# Altium PCB pcb_take1.PcbDoc (part 3 of 3)
Units mm, origin at the board's own origin, x right, y up, seen from the top; angles counter-clockwise.
Board outline 120 x 150 mm, 10 copper layers (Top Layer, Mid-Layer 1, Internal Plane 1, Internal Plane 2, Mid-Layer 2, MidLayer3, Mid-Layer 4, Mid-Layer 5, Mid-Layer 6, Bottom Layer); 173 components, 196 nets, 996 pads, 586 vias.
Unrouted connection lines stored in the file: 1.
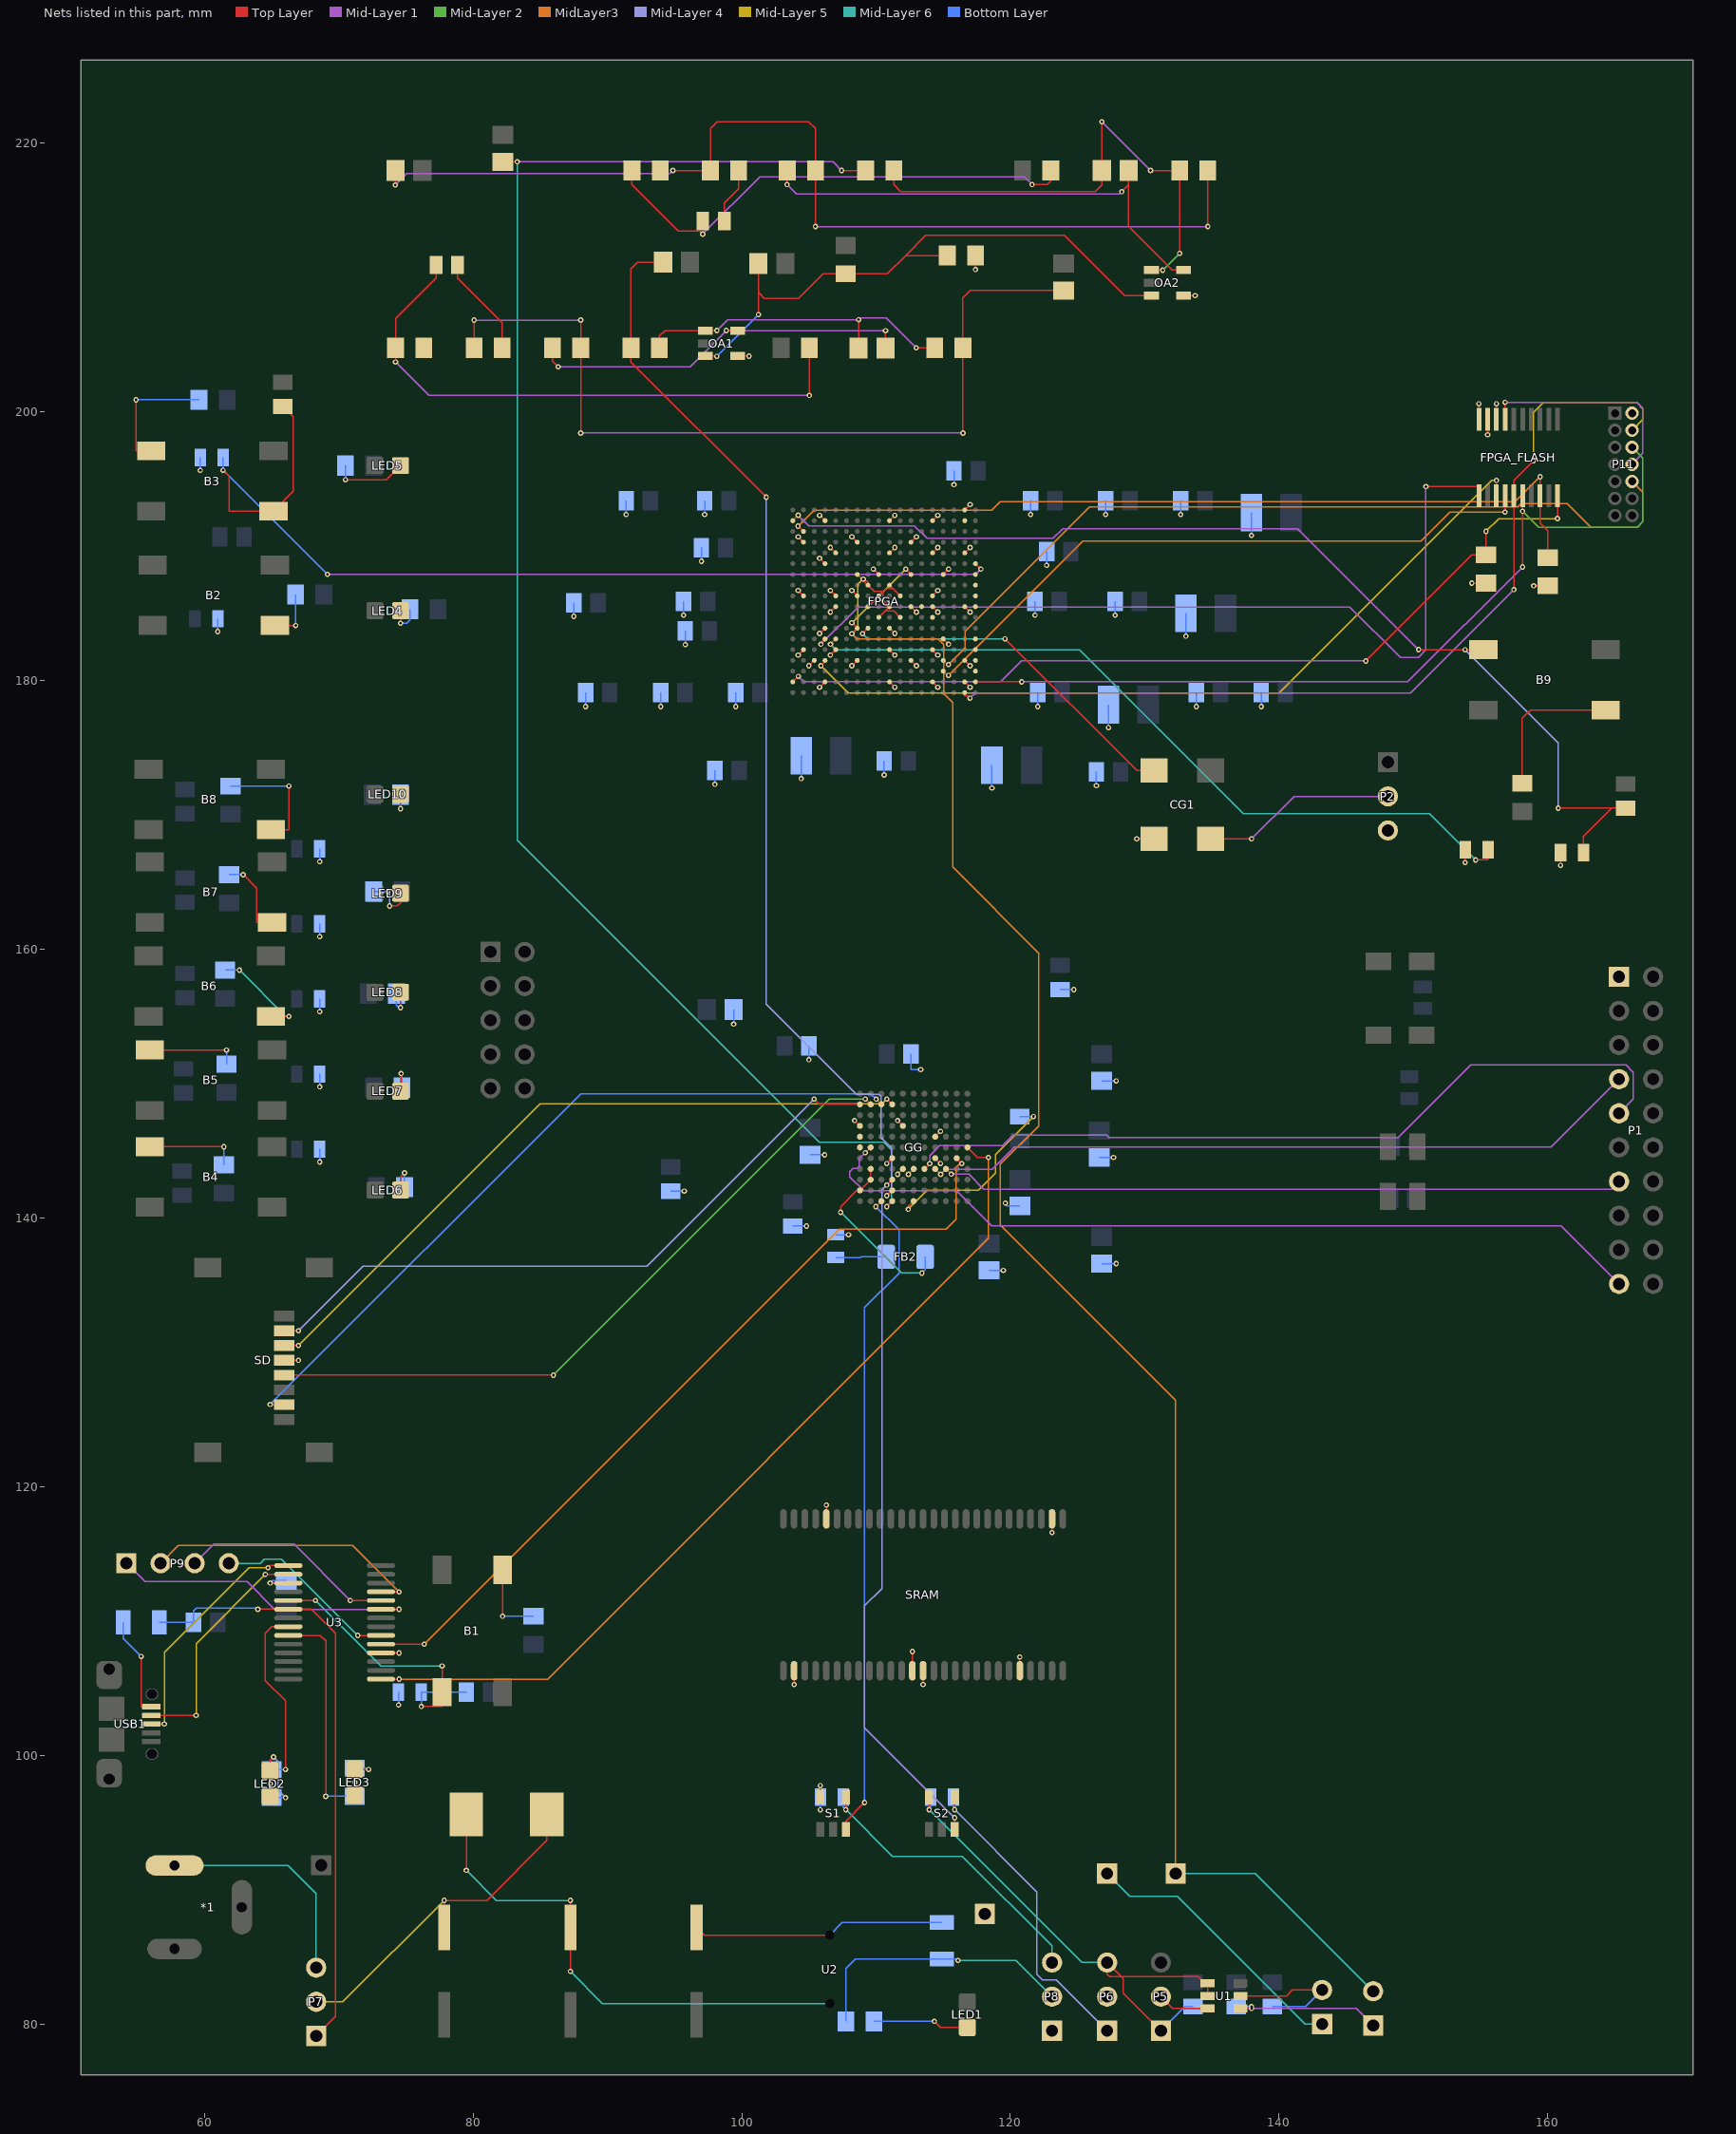
[diagram p11: the nets of this part, all layers, seen from the top]

## Via types
v1: diameter 0.4, hole 0.2, Top Layer to Bottom Layer, 586 vias

## Nets (pads, with @x,y where several pads share a name; then routed paths per layer and width w, separated by ;. In a path a pad name is that pad's centre, name@x,y a point inside that pad or via, vN(x,y) a via of type N, cw(c..) or ccw(c..) an arc to the next point about the centre after c; other vN are vias at no path point) (continued)
GPIO_FPGA3: B3.1 C55.2 FPGA.A6 R10.1 | length 76.6
  Top Layer w0.1: v1(61.392,195.656) 61.832,195.216 61.832,192.6 B3.1@65.15,192.6 66.624,194.074 66.624,199.626 C55.2@65.85,200.4 ; FPGA.A6@117.4,188.7 v1(117.805,188.295)
  Mid-Layer 1 w0.1: v1(69.155,187.909) 117.42,187.909 v1(117.805,188.295)
  Bottom Layer w0.1: v1(61.392,195.656) v1@61.4,195.664 ; R10.1@61.4,196.6 v1@61.4,195.664 ; v1(69.155,187.909) v1@61.4,195.664
GPIO_FPGA4: FPGA.A7
GPIO_FPGA5: FPGA.A8
GPIO_FPGA6: FPGA.A9
GPIO_FPGA7: FPGA.A10
GPIO_FPGA8: FPGA.F10
GPIO_FPGA9: FPGA.E11
GPIO_FPGA10: FPGA.A13
GPIO_FPGA11: FPGA.A14
GPIO_FPGA12: FPGA.A15
GPIO_FPGA13: FPGA.A16
GPIO_FPGA14: FPGA.B2
Net1_1: 1.1 GG.H10 R35.1 | length 81.3
  Top Layer w0.1: 1.1@94.147,211.135 92.253,211.135 91.762,210.644 R35.1@91.762,204.762 91.762,203.716 v1(101.829,193.65) ; v1(110.795,141.656) 110.806,141.656 GG.H10@111.2,142.05
  Mid-Layer 4 w0.1: v1(101.829,193.65) 101.829,155.905 108.534,149.2 110.236,149.2 110.363,149.073 110.363,145.999 111.15,145.212 111.15,142.011 v1(110.795,141.656)
Net2_1: 2.1 OA1.3 OA2.3 R36.1 R37.1 | length 45.4
  Top Layer w0.1: OA1.3@97.3,204.15 98.135,204.15 v1(98.146,204.14) ; v1(101.247,207.241) 101.247,208.89 ; 2.1@101.247,211.035 101.247,208.89 ; R36.1@115.297,211.635 112.196,211.635 ; OA2.3@130.5,208.65 128.499,208.65 124.017,213.131 113.692,213.131 112.196,211.635 ; 101.247,208.89 101.679,208.458 104.216,208.458 106.043,210.285 R37.1@107.747,210.285 110.846,210.285 112.196,211.635
  Bottom Layer w0.1: v1(98.146,204.14) v1(101.247,207.241)
Net3_1: 3.1 GG.H11 R43.1 | length 120.1
  Top Layer w0.1: 3.1@82.211,218.613 v1(83.287,218.613) ; v1(107.437,217.962) R43.1@109.228,217.962 ; v1(110.795,140.843) 110.795,140.845 GG.H11@111.2,141.25
  Mid-Layer 1 w0.1: v1(83.287,218.613) 106.786,218.613 v1(107.437,217.962)
  Mid-Layer 6 w0.1: v1(83.287,218.613) 83.287,168.123 105.766,145.644 110.592,145.644 111.15,145.085 111.15,141.199 v1(110.795,140.843)
NetB1_1: B1.1 C53.2 R7.1 U3.19 | length 22.5
  Top Layer w0.1: U3.19@66.25,111.525 v1(68.282,111.525) ; v1(76.15,103.632) 77.7,103.632 B1.1@77.7,104.7 v1(77.7,106.655)
  Mid-Layer 6 w0.1: v1(68.282,111.525) 73.152,106.655 v1(77.7,106.655)
  Bottom Layer w0.1: v1(76.15,103.632) R7.1@76.15,104.7 C53.2@79.5,104.7
NetB1_3: B1.3 R8.1 | length 5.8
  Top Layer w0.1: v1(82.2,110.35) B1.3@82.2,113.8
  Bottom Layer w0.1: v1(82.2,110.35) R8.1@84.5,110.35
NetB2_3: B2.3 R11.1 | length 3.9
  Top Layer w0.1: B2.3@65.25,184.1 v1(66.8,184.1)
  Bottom Layer w0.1: v1(66.8,184.1) R11.1@66.8,186.4
NetB3_3: B3.3 R14.1 | length 9.6
  Top Layer w0.1: v1(54.919,200.9) 54.919,197.1 B3.3@56.05,197.1
  Bottom Layer w0.1: v1(54.919,200.9) R14.1@59.6,200.9
NetB4_3: B4.3 R20.1 | length 6.8
  Top Layer w0.1: B4.3@55.95,145.3 v1(61.45,145.3)
  Bottom Layer w0.1: R20.1@61.45,143.95 v1(61.45,145.3)
NetB5_3: B5.3 R21.1 | length 6.7
  Top Layer w0.1: B5.3@55.95,152.5 v1(61.65,152.5)
  Bottom Layer w0.1: R21.1@61.65,151.45 v1(61.65,152.5)
NetB6_3: B6.3 R22.1 | length 7.5
  Top Layer w0.1: B6.3@64.95,155 v1(66.294,155)
  Mid-Layer 6 w0.1: v1(62.611,158.45) 66.061,155 v1(66.294,155)
  Bottom Layer w0.1: R22.1@61.55,158.45 v1(62.611,158.45)
NetB7_3: B7.3 R23.1 | length 6.2
  Top Layer w0.1: v1(62.89,165.55) 63.906,164.534 63.906,162 B7.3@65.05,162
  Bottom Layer w0.1: R23.1@61.85,165.55 v1(62.89,165.55)
NetB8_3: B8.3 R24.1 | length 8.9
  Top Layer w0.1: B8.3@64.95,168.9 66.284,168.9 66.294,168.91 v1(66.294,172.15)
  Bottom Layer w0.1: R24.1@61.95,172.15 v1(66.294,172.15)
NetB9_1: B9.1 C67.2 FPGA.V2 R47.1 | length 80.2
  Top Layer w0.1: FPGA.V2@103.8,191.9 v1(104.203,192.303) ; v1(150.393,182.3) v1@153.848,182.3 ; v1(153.848,182.296) v1@153.848,182.3 ; B9.1@155.2,182.3 v1@153.848,182.3 ; v1(160.782,170.5) 164.77,170.5 ; R47.1@162.65,167.2 162.65,168.38 164.77,170.5 ; C67.2@165.8,170.5 164.77,170.5
  Mid-Layer 1 w0.1: v1(104.203,192.303) 104.991,191.516 112.852,191.516 113.792,190.576 123.165,190.576 123.901,191.313 141.381,191.313 v1(150.393,182.3)
  Mid-Layer 4 w0.1: v1(153.848,182.296) 160.782,175.362 v1(160.782,170.5)
NetB9_3: B9.3 R48.1 | length 11.3
  Top Layer w0.1: R48.1@158.1,172.35 158.1,177.19 158.71,177.8 B9.3@164.3,177.8
NetC1_1: C1.1 GG.F11 | length 14.8
  Top Layer w0.1: v1(112.395,140.64) 112.395,140.845 GG.F11@112.8,141.25
  Mid-Layer 5 w0.1: v1(112.395,140.64) 113.817,142.062 117.604,142.062 118.889,143.347 118.889,144.721 v1(121.717,147.549)
  Bottom Layer w0.1: C1.1@120.7,147.55 121.715,147.55 v1(121.717,147.549)
NetC45_1: C45.1 P4.1 U1.4 | length 11.8
  Top Layer w0.1: U1.4@137.125,81.15 v1@137.797,81.15 ; v1(137.947,81.3) v1@137.797,81.15 ; v1(137.95,81.153) 137.947,81.15 v1@137.797,81.15
  Mid-Layer 1 w0.1: v1(137.95,81.153) 145.747,81.153 P4.1@147,79.9
  Bottom Layer w0.1: C45.1@136.8,81.3 v1(137.947,81.3)
NetC46_2: C46.2 P3.2 U1.5 | length 10.5
  Top Layer w0.1: U1.5@137.125,82.1 140.556,82.1 140.996,82.54 P3.2@143.2,82.54
  Bottom Layer w0.1: C46.2@139.5,81.3 141.96,81.3 P3.2@143.2,82.54
NetC47_1: C47.1 P5.1 P6.3 R2.1 S2.5 U1.1 U1.2 | length 39.3
  Top Layer w0.1: v1(113.95,95.961) S2.5@113.95,96.9 ; P5.1@131.2,79.5 128.397,82.303 128.397,83.383 128.265,83.515 ; U1.2@134.675,82.1 U1.1@134.675,83.05 134.442,83.05 133.977,83.515 128.265,83.515 ; 128.265,83.515 127.403,83.515 127.2,83.718 P6.3@127.2,84.58 128.265,83.515
  Mid-Layer 6 w0.1: v1(113.95,95.961) 125.331,84.58 P6.3@127.2,84.58
  Bottom Layer w0.1: v1(113.95,95.961) 114.05,96.061 R2.1@114.05,96.9 ; P5.1@131.2,79.5 133,81.3 C47.1@133.6,81.3
NetC48_2: C48.2 L1.1 P7.2 | length 26.1
  Top Layer w0.1: C48.2@77.851,87.197 v1(77.851,89.205) 81.026,89.205 85.5,93.679 L1.1@85.5,95.6
  Mid-Layer 5 w0.1: P7.2@68.326,81.661 70.307,81.661 v1(77.851,89.205)
NetC49_2: C49.2 L1.2 U2.1 | length 38.4
  Top Layer w0.1: v1(79.5,91.44) L1.2@79.5,95.6 ; v1(87.249,83.922) C49.2@87.249,87.197 v1(87.249,89.205)
  Mid-Layer 6 w0.1: v1(79.5,91.44) 81.735,89.205 v1(87.249,89.205) ; v1(87.249,83.922) 89.637,81.534 U2.1@106.553,81.534
NetC50_2: C50.2 FB1.1 U2.3 | length 18.9
  Top Layer w0.1: C50.2@96.647,87.197 97.23,86.614 U2.3@106.553,86.614
  Bottom Layer w0.1: U2.3@106.553,86.614 107.489,87.55 FB1.1@114.9,87.55
NetC52_1: C52.1 U3.17 | length 2.6
  Top Layer w0.1: v1(64.897,112.825) U3.17@66.25,112.825
  Bottom Layer w0.1: v1(64.897,112.825) 65.072,113 C52.1@66.1,113
NetC61_1: C61.1 OA1.1 R30.1 R35.2 | length 25
  Top Layer w0.1: R35.2@93.862,204.762 93.862,205.638 94.274,206.05 OA1.1@97.3,206.05 v1(98.15,206.05) ; C61.1@108.703,204.762 v1(108.703,206.858) ; v1(112.992,204.762) R30.1@114.368,204.762
  Mid-Layer 1 w0.1: v1(98.15,206.05) 98.958,206.858 v1(108.703,206.858) 108.846,207.001 110.753,207.001 v1(112.992,204.762)
NetC61_2: C61.2 OA1.5 R34.1 | length 29.2
  Top Layer w0.1: R34.1@85.92,204.762 85.92,203.767 v1(86.335,203.352) ; v1(98.85,206.05) v1@98.862,206.05 ; v1(98.857,206.045) v1@98.862,206.05 ; OA1.5@99.7,206.05 v1@98.862,206.05 ; C61.2@110.703,204.762 v1(110.703,206.045)
  Mid-Layer 1 w0.1: v1(86.335,203.352) 96.152,203.352 v1(98.85,206.05) ; v1(98.857,206.045) v1(110.703,206.045)
NetC62_1: C62.1 R33.2 | length 7.6
  Top Layer w0.1: C62.1@78.847,210.935 78.847,209.956 82.178,206.625 R33.2@82.178,204.762
NetC62_2: C62.2 R31.2 R32.1 | length 43.8
  Top Layer w0.1: v1(74.236,203.712) R32.1@74.236,204.762 74.236,206.945 77.247,209.956 C62.2@77.247,210.935 ; v1(105.038,201.219) R31.2@105.038,204.762
  Mid-Layer 1 w0.1: v1(74.236,203.712) 76.729,201.219 v1(105.038,201.219)
NetC63_1: C63.1 R30.2 R33.1 R34.2 | length 64.6
  Top Layer w0.1: R33.1@80.078,204.762 v1(80.078,206.832) ; v1(88.02,198.425) R34.2@88.02,204.762 v1(88.02,206.832) ; v1(116.468,198.425) R30.2@116.468,204.762 116.468,208.483 117.02,209.035 C63.1@123.947,209.035
  Mid-Layer 1 w0.1: v1(80.078,206.832) v1(88.02,206.832) ; v1(88.02,198.425) v1(116.468,198.425)
NetC64_1: C64.1 OA2.1 R38.1 R43.2 | length 37.7
  Top Layer w0.1: R43.2@111.328,217.962 111.328,216.916 111.836,216.408 126.314,216.408 126.804,216.898 C64.1@126.804,217.962 v1(126.804,221.59) ; v1(130.432,217.962) R38.1@132.596,217.962 v1(132.596,211.793) ; OA2.1@130.5,210.55 131.334,210.55 v1(131.343,210.541)
  Mid-Layer 1 w0.1: v1(126.804,221.59) v1(130.432,217.962)
  Mid-Layer 2 w0.1: v1(131.343,210.541) v1(132.596,211.793)
NetC64_2: C64.2 OA2.5 R42.1 | length 36.7
  Top Layer w0.1: v1(103.378,216.916) 103.386,216.924 R42.1@103.386,217.962 ; v1(128.295,216.383) 128.804,216.891 ; C64.2@128.804,217.962 128.804,216.891 ; OA2.5@132.9,210.55 132.055,210.55 128.804,213.801 128.804,216.891
  Mid-Layer 1 w0.1: v1(103.378,216.916) 104.086,216.208 128.121,216.208 v1(128.295,216.383)
NetC65_1: C65.1 R41.2 | length 4.2
  Top Layer w0.1: C65.1@98.7,214.2 98.7,215.544 99.771,216.615 R41.2@99.771,217.962
NetC65_2: C65.2 R39.2 R40.1 | length 37.6
  Top Layer w0.1: R40.1@91.829,217.962 91.829,216.908 95.275,213.462 96.871,213.462 v1(97.1,213.233) C65.2@97.1,214.2 ; v1(121.614,216.916) 122.733,216.916 123.012,217.195 R39.2@123.012,217.962
  Mid-Layer 1 w0.1: v1(97.1,213.233) 101.342,217.475 121.055,217.475 v1(121.614,216.916)
NetC66_1: C66.1 R38.2 R41.1 R42.2 | length 77
  Top Layer w0.1: v1(74.219,216.891) 74.226,216.898 C66.1@74.226,217.962 ; v1(94.869,217.962) R41.1@97.671,217.962 97.671,221.082 98.179,221.59 104.978,221.59 105.486,221.082 R42.2@105.486,217.962 v1(105.486,213.792) ; v1(134.696,213.792) R38.2@134.696,217.962
  Mid-Layer 1 w0.1: v1(74.219,216.891) 75.057,217.729 94.636,217.729 v1(94.869,217.962) ; v1(105.486,213.792) v1(134.696,213.792)
NetCG1_1: CG1.1 P2.2 | length 14.5
  Top Layer w0.1: CG1.1@134.9,168.22 v1(137.947,168.22)
  Mid-Layer 1 w0.1: v1(137.947,168.22) 141.107,171.38 P2.2@148.1,171.38
NetCG1_3: CG1.3 FPGA.L12 | length 26.5
  Top Layer w0.1: v1(108.991,183.49) 108.991,183.491 FPGA.L12@109.4,183.9 ; v1(119.6,183.109) 129.409,173.3 CG1.3@130.7,173.3
  Mid-Layer 6 w0.1: v1(108.991,183.49) 109.372,183.109 v1(119.6,183.109)
NetFB1_2: FB1.2 P8.2 R3.2 | length 20.7
  Mid-Layer 6 w0.1: v1(116.103,84.734) 120.406,84.734 P8.2@123.1,82.04
  Bottom Layer w0.1: R3.2@107.75,80.2 107.75,84.125 108.475,84.85 FB1.2@114.9,84.85 115.988,84.85 v1(116.103,84.734)
NetFB2_1: FB2.1 GG.K8 GG.K9 GG.L10 | length 13.5
  Top Layer w0.1: v1(107.357,140.421) 107.357,140.84 108.567,142.05 GG.L10@108.8,142.05 GG.K9@109.6,142.85 GG.K8@109.6,143.65
  Mid-Layer 6 w0.1: v1(107.357,140.421) 111.878,135.9 v1(113.406,135.9)
  Bottom Layer w0.1: v1(113.406,135.9) 113.65,136.144 FB2.1@113.65,137.1
NetFB2_2: FB2.2 R1.1 | length 3.8
  Bottom Layer w0.1: R1.1@107,137.05 108.839,137.05 108.889,137.1 FB2.2@110.75,137.1
NetFB3_1: FB3.1 USB1.1 | length 7.6
  Top Layer w0.1: v1(55.296,107.366) 55.296,103.625 USB1.1@56.05,103.625
  Bottom Layer w0.1: FB3.1@53.95,109.9 53.95,108.712 v1(55.296,107.366)
NetFPGA_A17: FPGA.A17 FPGA_FLASH.6 P11.6 | length 65.1
  Top Layer w0.1: FPGA.A17@117.4,179.9 v1(120.845,179.9) ; v1(158.125,188.453) v1(158.125,192.6) FPGA_FLASH.6@158.125,193.75
  Mid-Layer 1 w0.1: v1(120.845,179.9) 149.572,179.9 v1(158.125,188.453)
  Mid-Layer 2 w0.1: v1(158.125,192.6) 159.311,191.414 166.675,191.414 167.081,191.821 167.081,196.549 P11.6@166.27,197.36
NetFPGA_B18: FPGA.B18 FPGA_FLASH.5 P11.4 | length 68.9
  Top Layer w0.1: FPGA.B18@116.6,179.1 116.6,178.867 116.815,178.867 v1(116.992,178.689) ; v1(157.475,186.766) FPGA_FLASH.5@157.475,193.75 157.475,194.894 v1(158.928,196.347)
  Mid-Layer 1 w0.1: v1(116.992,178.689) 117.373,179.07 149.779,179.07 v1(157.475,186.766)
  Mid-Layer 5 w0.1: v1(158.928,196.347) 158.928,199.949 159.69,200.711 166.624,200.711 167.081,200.254 167.081,199.441 P11.4@166.27,198.63
NetFPGA_D15: FPGA.D15 P11.10 | length 62.1
  Top Layer w0.1: FPGA.D15@115,181.5 115.316,181.184 v1(115.392,181.184)
  MidLayer3 w0.1: v1(115.392,181.184) 116.637,182.429 116.637,183.655 125.905,192.923 157.785,192.923 158.029,193.167 161.442,193.167 163.195,191.414 166.675,191.414 167.081,191.821 167.081,194.009 P11.10@166.27,194.82
NetFPGA_D16: FPGA.D16 FPGA_FLASH.4 | length 48.2
  Top Layer w0.1: FPGA.D16@115,180.7 115.316,180.384 v1(115.392,180.384) ; v1(156.82,192.534) 156.825,192.539 FPGA_FLASH.4@156.825,193.75
  MidLayer3 w0.1: v1(115.392,180.384) 125.377,190.369 150.551,190.369 152.715,192.534 v1(156.82,192.534)
NetFPGA_FLASH_17: FPGA_FLASH.17 P11.8 | length 16.2
  Top Layer w0.1: FPGA_FLASH.17@156.825,199.45 v1(156.825,200.711)
  Mid-Layer 1 w0.1: v1(156.825,200.711) 166.624,200.711 167.081,200.254 167.081,196.901 P11.8@166.27,196.09
NetFPGA_P13: FPGA.P13 R46.1 | length 56.9
  Top Layer w0.1: v1(106.604,182.702) 106.604,182.704 FPGA.P13@107,183.1 ; v1(154.634,166.651) 155.55,166.651 R46.1@155.55,167.4
  Mid-Layer 6 w0.1: v1(106.604,182.702) 107.01,182.296 125.146,182.296 137.338,170.104 151.181,170.104 v1(154.634,166.651)
NetFPGA_R13: FPGA.R13 FPGA_FLASH.1 | length 65.3
  Top Layer w0.1: v1(105.893,182.702) 105.893,182.793 FPGA.R13@106.2,183.1 ; v1(150.927,194.437) 154.875,194.437 FPGA_FLASH.1@154.875,193.75
  Mid-Layer 1 w0.1: v1(105.893,182.702) 108.661,185.471 145.263,185.471 149.022,181.712 150.368,181.712 150.927,182.27 v1(150.927,194.437)
NetFPGA_R15: FPGA.R15 FPGA_FLASH.3 | length 59.3
  Top Layer w0.1: v1(105.893,181.102) 106.096,181.305 FPGA.R15@106.2,181.5 ; FPGA_FLASH.3@156.175,193.75 v1(156.175,194.894)
  Mid-Layer 5 w0.1: v1(105.893,181.102) 107.925,179.07 140.005,179.07 155.829,194.894 v1(156.175,194.894)
NetFPGA_U3: FPGA.U3 FPGA_FLASH.8 R44.2 | length 63.6
  Top Layer w0.1: v1(104.191,191.491) 104.209,191.491 FPGA.U3@104.6,191.1 ; v1(159.425,195.174) FPGA_FLASH.8@159.425,193.75 159.425,191.735 160,191.16 R44.2@160,189.15
  MidLayer3 w0.1: v1(104.191,191.491) 105.385,192.684 118.618,192.684 119.25,193.316 157.568,193.316 v1(159.425,195.174)
NetFPGA_V17: FPGA.V17 FPGA_FLASH.10 R45.2 | length 65
  Top Layer w0.1: FPGA.V17@103.8,179.9 v1(104.215,180.315) ; v1(146.463,181.458) 154.356,189.35 R45.2@155.4,189.35 v1(155.4,191.11) ; v1(160.725,192.055) FPGA_FLASH.10@160.725,193.75
  Mid-Layer 1 w0.1: v1(104.215,180.315) 104.623,179.908 119.278,179.908 120.828,181.458 v1(146.463,181.458)
  Mid-Layer 5 w0.1: v1(155.4,191.11) 156.345,192.055 v1(160.725,192.055)
NetGG_A6: GG.A6 U3.1 | length 66.7
  Top Layer w0.1: U3.1@73.15,105.675 v1(74.498,105.675) ; GG.A6@116.8,145.25 117.548,144.502 v1(118.363,144.502)
  MidLayer3 w0.1: v1(74.498,105.675) 85.558,105.675 118.363,138.48 v1(118.363,144.502)
NetGG_B7: GG.B7 U3.5 | length 61
  Top Layer w0.1: U3.5@73.15,108.275 v1(76.373,108.275) ; GG.B7@116,144.45 116,144.247 116.18,144.247 v1(116.383,144.043)
  MidLayer3 w0.1: v1(76.373,108.275) 107.264,139.167 115.214,139.167 115.951,139.903 115.951,143.764 116.23,144.043 v1(116.383,144.043)
NetGG_H9: GG.H9 S2.3 | length 52
  Top Layer w0.1: v1(110.795,142.445) GG.H9@111.2,142.85 ; S2.3@115.85,94.5 v1(115.85,95.352)
  Mid-Layer 4 w0.1: v1(110.795,142.445) 110.439,142.089 110.439,112.42 109.144,111.125 109.144,102.058 v1(115.85,95.352)
NetGG_K6: GG.K6 P1.19 | length 63.6
  Top Layer w0.1: v1(109.195,144.856) 109.206,144.856 GG.K6@109.6,145.25
  Mid-Layer 1 w0.1: v1(109.195,144.856) 108.763,144.424 108.763,143.84 108.61,143.688 108.28,143.688 108.052,143.459 108.052,143.053 109.093,142.011 116.002,142.011 118.618,139.395 160.995,139.395 P1.19@165.3,135.09
NetGG_L5: GG.L5
NetGG_L6: GG.L6
NetLED1_A: LED1.A R3.1 | length 7.1
  Top Layer w0.1: v1(114.339,80.2) 114.791,79.748 LED1.A@116.8,79.748
  Bottom Layer w0.1: R3.1@109.85,80.2 v1(114.339,80.2)
NetLED2_K: LED2.K R5.1 | length 5.6
  Top Layer w0.1: LED2.K@64.9,98.852 64.9,99.631 v1(65.148,99.879)
  Mid-Layer 4 w0.1: v1(65.148,99.879) 65.481,99.546 65.481,97.409 v1(66.04,96.85)
  Bottom Layer w0.1: R5.1@65,96.85 v1(66.04,96.85)
NetLED3_K: LED3.K R6.1 | length 2.1
  Top Layer w0.1: LED3.K@71.2,98.953 v1(72.238,98.953)
  Bottom Layer w0.1: R6.1@71.2,99.05 72.14,99.05 v1(72.238,98.953)
NetLED4_A: LED4.A R12.1 | length 2.5
  Top Layer w0.1: v1(74.602,184.263) LED4.A@74.602,185.2
  Bottom Layer w0.1: v1(74.602,184.263) 75.057,184.263 75.3,184.506 R12.1@75.3,185.3
NetLED5_A: LED5.A R13.1 | length 5.6
  Top Layer w0.1: v1(70.5,194.945) 73.547,194.945 LED5.A@74.602,196
  Bottom Layer w0.1: v1(70.5,194.945) R13.1@70.5,196
NetLED6_A: LED6.A R25.1 | length 2.5
  Top Layer w0.1: LED6.A@74.602,142.068 74.602,143.055 v1(74.905,143.358)
  Bottom Layer w0.1: R25.1@74.9,142.3 74.9,143.353 v1(74.905,143.358)
NetLED7_A: LED7.A R26.1 | length 2.4
  Top Layer w0.1: LED7.A@74.602,149.434 74.651,149.482 v1(74.651,150.749)
  Bottom Layer w0.1: v1(74.651,150.749) 74.7,150.7 R26.1@74.7,149.7
NetLED8_A: LED8.A R27.1 | length 2.4
  Top Layer w0.1: v1(74.602,155.651) LED8.A@74.602,156.8
  Bottom Layer w0.1: R27.1@74.3,156.7 74.3,155.854 74.503,155.651 v1(74.602,155.651)
NetLED9_A: LED9.A R28.1 | length 3.8
  Top Layer w0.1: v1(73.787,163.22) 74.371,163.22 74.602,163.452 LED9.A@74.602,164.166
  Mid-Layer 4 w0.1: v1(73.654,164.3) 73.787,164.167 v1(73.787,163.22)
  Bottom Layer w0.1: R28.1@72.6,164.3 v1(73.654,164.3)
NetLED10_A: LED10.A R29.1 | length 2.1
  Top Layer w0.1: v1(74.602,170.462) LED10.A@74.602,171.532
  Bottom Layer w0.1: R29.1@74.6,171.5 74.6,170.465 v1(74.602,170.462)
NetMJ1_1: R40.2
NetMJ1_2: R32.2
NetP5_2: P5.2 U1.3 | length 3.8
  Top Layer w0.1: P5.2@131.2,82.04 132.09,81.15 U1.3@134.675,81.15
NetP6_1: P6.1 R2.2 S2.4 | length 23.7
  Top Layer w0.1: v1(115.85,95.961) S2.4@115.85,96.9
  Mid-Layer 4 w0.1: v1(115.85,95.961) 121.971,89.84 121.971,83.718 122.403,83.287 123.413,83.287 P6.1@127.2,79.5
  Bottom Layer w0.1: R2.2@115.75,96.9 115.75,96.061 v1(115.85,95.961)
NetP8_3: P8.3 R4.1 S1.4 | length 22.7
  Top Layer w0.1: v1(107.75,95.961) S1.4@107.75,96.9
  Mid-Layer 6 w0.1: v1(107.75,95.961) 111.23,92.481 116.434,92.481 123.1,85.815 P8.3@123.1,84.58
  Bottom Layer w0.1: R4.1@107.55,96.9 107.55,96.161 v1(107.75,95.961)
NetP9_1: P9.1 U3.9 | length 23.1
  Top Layer w0.1: U3.9@73.15,110.875 74.494,110.875 v1(74.498,110.871)
  Mid-Layer 1 w0.1: P9.1@54.2,114.3 55.572,112.928 63.195,112.928 65.253,110.871 v1(74.498,110.871)
NetP9_2: P9.2 U3.11 | length 21.1
  Top Layer w0.1: U3.11@73.15,112.175 74.49,112.175 v1(74.498,112.166)
  MidLayer3 w0.1: P9.2@56.74,114.3 58.061,115.621 71.044,115.621 v1(74.498,112.166)
NetP9_3: P9.3 U3.10 | length 16.2
  Top Layer w0.1: v1(70.866,111.525) U3.10@73.15,111.525
  Mid-Layer 1 w0.1: P9.3@59.28,114.3 60.702,115.722 66.669,115.722 v1(70.866,111.525)
NetP9_4: P9.4 U3.6 | length 13.8
  Top Layer w0.1: v1(71.425,108.925) U3.6@73.15,108.925
  Mid-Layer 6 w0.1: P9.4@61.82,114.3 64.17,114.3 64.475,114.605 65.745,114.605 v1(71.425,108.925)
NetR5_2: R5.2 U3.22 | length 13.7
  Top Layer w0.1: v1(66.04,98.95) 66.04,104.064 64.541,105.562 64.541,109.092 65.024,109.575 U3.22@66.25,109.575
  Bottom Layer w0.1: R5.2@65,98.95 v1(66.04,98.95)
NetR6_2: R6.2 U3.23 | length 16.7
  Top Layer w0.1: U3.23@66.25,108.925 68.621,108.925 69.037,108.509 v1(69.037,96.95)
  Bottom Layer w0.1: v1(69.037,96.95) R6.2@71.2,96.95
NetU3_15: U3.15 USB1.3 | length 18.2
  Top Layer w0.1: USB1.3@56.05,102.325 57.011,102.325 v1(57.023,102.337) ; v1(64.742,113.97) 64.897,114.125 U3.15@66.25,114.125
  Mid-Layer 5 w0.1: v1(57.023,102.337) 57.023,107.671 63.322,113.97 v1(64.742,113.97)
NetU3_16: U3.16 USB1.2 | length 17.7
  Top Layer w0.1: USB1.2@56.05,102.975 v1(59.389,102.975) ; v1(64.541,113.475) U3.16@66.25,113.475
  Mid-Layer 5 w0.1: v1(59.389,102.975) 59.389,108.322 v1(64.541,113.475)
PWRIN: *1.1 P7.3 | length 16.9
  Mid-Layer 6 w0.1: *1.1@57.785,91.798 66.243,91.798 68.326,89.715 P7.3@68.326,84.201
SWCLK: GG.E8 P1.9 | length 60.2
  Top Layer w0.1: GG.E8@113.6,143.65 v1(113.995,144.045)
  Mid-Layer 1 w0.1: v1(113.995,144.045) 113.995,144.653 114.712,145.37 119.411,145.37 120.193,146.152 127.152,146.152 127.33,145.974 148.869,145.974 154.28,151.384 165.811,151.384 166.37,150.825 166.37,148.86 P1.9@165.3,147.79
SWDIO: GG.D8 P1.7 | length 54
  Top Layer w0.1: GG.D8@114.4,143.65 114.8,143.25 v1(114.808,143.25)
  Mid-Layer 1 w0.1: v1(114.808,143.25) 115.189,143.631 118.643,143.631 120.3,145.288 160.258,145.288 P1.7@165.3,150.33
SWO: GG.C8 P1.13 | length 51
  Top Layer w0.1: GG.C8@115.2,143.65 v1(115.594,143.256)
  Mid-Layer 1 w0.1: v1(115.594,143.256) 116.9,143.256 118.018,142.138 164.728,142.138 P1.13@165.3,142.71
TOADC: GG.J11 S1.3 | length 49.3
  Top Layer w0.1: S1.3@107.75,94.5 107.75,95.098 v1(109.144,96.491) ; v1(109.982,140.843) 109.993,140.843 GG.J11@110.4,141.25
  Bottom Layer w0.1: v1(109.144,96.491) 109.144,133.325 111.709,135.89 111.709,139.116 v1(109.982,140.843)
US2_CLK: GG.K2 SD.5 | length 52.3
  Top Layer w0.1: SD.5@65.95,128.3 v1(85.984,128.3) ; v1(109.195,148.844) 109.206,148.844 GG.K2@109.6,148.45
  Mid-Layer 2 w0.1: v1(85.984,128.3) 106.528,148.844 v1(109.195,148.844)
US2_CS: GG.L2 SD.2 | length 50.2
  Top Layer w0.1: SD.2@65.95,131.6 v1(67.005,131.6) ; v1(105.385,148.844) 105.779,148.45 GG.L2@108.8,148.45
  Mid-Layer 4 w0.1: v1(67.005,131.6) 71.803,136.398 92.939,136.398 v1(105.385,148.844)
US2_RX: GG.J2 SD.7 | length 56.5
  Top Layer w0.1: v1(64.897,126.111) 64.908,126.1 SD.7@65.95,126.1 ; v1(110.007,148.843) GG.J2@110.4,148.45
  Bottom Layer w0.1: v1(64.897,126.111) 88.036,149.25 109.6,149.25 v1(110.007,148.843)
US2_TX: GG.H2 SD.3 | length 53
  Top Layer w0.1: SD.3@65.95,130.5 v1(67.005,130.5) ; v1(110.795,148.844) 110.806,148.844 GG.H2@111.2,148.45
  Mid-Layer 5 w0.1: v1(67.005,130.5) 84.994,148.488 110.439,148.488 v1(110.795,148.844)
VCC12: FPGA.G7 FPGA.H9 FPGA.H11 FPGA.J8 FPGA.J10 FPGA.K9 FPGA.K11 FPGA.L8 FPGA.L10 FPGA.M7 FPGA.M12 J3.1 P4.2 | length 148.7
  Top Layer w0.1: v1(108.204,183.49) 108.204,183.504 FPGA.M12@108.6,183.9 v1(108.204,184.296) ; FPGA.M7@108.6,187.9 FPGA.L8@109.4,187.1 ; v1(109.042,187.554) 109.18,187.416 109.4,187.416 FPGA.L8@109.4,187.1 ; FPGA.L10@109.4,185.5 FPGA.K9@110.2,186.3 110.516,186.616 ; FPGA.K11@110.2,184.7 110.684,185.184 ; FPGA.J8@111,187.1 111.242,186.858 ; FPGA.H11@111.8,184.7 111.316,185.184 110.684,185.184 ; FPGA.H9@111.8,186.3 111.242,186.858 ; v1(112.204,188.296) FPGA.G7@112.6,187.9 ; FPGA.L8@109.4,187.1 109.884,186.616 110.516,186.616 ; 110.516,186.616 110.516,185.984 FPGA.J10@111,185.5 110.684,185.184 ; 110.516,186.616 110.758,186.858 111.242,186.858
  MidLayer3 w0.1: v1(108.204,183.49) 108.585,183.109 114.605,183.109 115.037,182.677 115.037,179.019 115.697,178.359 115.697,166.116 122.098,159.715 122.098,146.837 119.253,143.993 119.253,139.497 132.3,126.45 J3.1@132.3,91.2
  Mid-Layer 5 w0.1: v1(108.204,183.49) 108.636,183.921 108.636,184.728 ; v1(108.204,184.296) 108.636,184.728 ; v1(109.042,187.554) 108.636,187.147 108.636,184.728 ; v1(112.204,188.296) 108.636,184.728
  Mid-Layer 6 w0.1: J3.1@132.3,91.2 138.24,91.2 P4.2@147,82.44
VCC18: J2.1 P3.1 | length 20.6
  Mid-Layer 6 w0.1: J2.1@127.2,91.2 128.89,89.51 132.41,89.51 141.92,80 P3.1@143.2,80
VCC33: C2.2 C3.2 C4.2 C5.2 C6.2 C7.2 C8.2 C9.2 C10.2 C11.2 C12.2 C13.2 C14.2 C15.2 C16.2 C17.2 C18.2 C19.2 C20.2 C21.2 C22.2 C23.2 C24.2 C25.2 C26.2 C27.2 C28.2 C29.2 C30.2 C31.2 C32.2 C33.2 C34.2 C35.2 C36.2 C37.2 C38.2 C39.2 C40.2 CG1.4 FPGA.B1 FPGA.B5 FPGA.B10 FPGA.B15 FPGA.B17 FPGA.D7 FPGA.D13 FPGA.E2 FPGA.E5 FPGA.E9 FPGA.E10 FPGA.E14 FPGA.E17 FPGA.G4 FPGA.G10 FPGA.G15 FPGA.J2 FPGA.J5 FPGA.J12 FPGA.J14 FPGA.J17 FPGA.K7 FPGA.M4 FPGA.M9 FPGA.M15 FPGA.P5 FPGA.P9 FPGA.P10 FPGA.P14 FPGA.R2 FPGA.R6 FPGA.R12 FPGA.R17 FPGA.T15 FPGA.U4 FPGA.U9 FPGA.U14 FPGA_FLASH.18 FPGA_FLASH.19 FPGA_FLASH.20 GG.D5 GG.D7 GG.F8 GG.G4 GG.G8 GG.H7 GG.L4 J1.1 LED2.A LED3.A OA1.4 OA2.4 P1.1 P2.3 P6.2 P8.1 R1.2 R4.2 R7.2 R9.2 R10.2 R15.2 R16.2 R17.2 R18.2 R19.2 R36.2 R44.1 R45.1 R46.2 R47.2 S1.5 SD.4 SRAM.2 SRAM.13 SRAM.14 SRAM.23 SRAM.29 SRAM.50 U3.4 | length 102.2
  Top Layer w0.1: LED2.A@64.9,96.947 v1(64.9,97.883) ; SD.4@65.95,129.4 v1(67,129.4) ; LED3.A@71.2,97.048 v1(71.2,97.983) ; U3.4@73.15,107.625 v1(74.5,107.625) ; OA1.4@99.7,204.15 v1(100.55,204.15) ; v1(103.9,105.275) SRAM.2@103.9,106.3 ; v1(104.2,181.9) FPGA.U14@104.6,182.3 ; v1(104.2,186.7) FPGA.U9@104.6,186.3 ; v1(104.2,190.7) FPGA.U4@104.6,190.3 ; v1(105,181.1) FPGA.T15@105.4,181.5 ; v1(105.8,179.5) FPGA.R17@106.2,179.9 ; v1(105.8,183.5) FPGA.R12@106.2,183.9 ; v1(105.8,189.1) FPGA.R6@106.2,188.7 ; v1(105.8,192.3) FPGA.R2@106.2,191.9 ; S1.5@105.85,96.9 v1(105.85,97.75) ; SRAM.50@106.3,117.6 v1(106.3,118.625) ; v1(106.6,181.9) FPGA.P14@107,182.3 ; v1(106.6,185.1) FPGA.P10@107,185.5 ; v1(106.6,186.7) FPGA.P9@107,186.3 ; v1(106.6,189.9) FPGA.P5@107,189.5 ; v1(108.2,181.1) FPGA.M15@108.6,181.5 ; v1(108.2,186.7) FPGA.M9@108.6,186.3 ; v1(108.2,190.7) FPGA.M4@108.6,190.3 ; v1(108.4,147.25) GG.L4@108.8,146.85 ; v1(109.8,188.3) FPGA.K7@110.2,187.9 ; v1(110.8,144.05) GG.H7@111.2,144.45 ; FPGA.J17@111,179.9 v1(111.4,179.5) ; FPGA.J14@111,182.3 v1(111.4,181.9) ; FPGA.J12@111,183.9 v1(111.4,183.5) ; FPGA.J5@111,189.5 v1(111.4,189.9) ; FPGA.J2@111,191.9 v1(111.4,192.3) ; v1(111.6,143.25) GG.G8@112,143.65 ; v1(111.6,147.25) GG.G4@112,146.85 ; v1(112.4,143.25) GG.F8@112.8,143.65 ; FPGA.G15@112.6,181.5 v1(113,181.1) ; FPGA.G10@112.6,185.5 v1(113,185.1) ; FPGA.G4@112.6,190.3 v1(113,190.7) ; SRAM.13@112.7,106.3 v1(112.7,107.731) ; v1(113.5,105.275) SRAM.14@113.5,106.3 ; FPGA.E17@114.2,179.9 v1(114.6,179.5) ; FPGA.E14@114.2,182.3 v1(114.6,181.9) ; FPGA.E10@114.2,185.5 v1(114.6,185.1) ; FPGA.E9@114.2,186.3 v1(114.6,186.7) ; FPGA.E5@114.2,189.5 v1(114.6,189.9) ; FPGA.E2@114.2,191.9 v1(114.6,192.3) ; GG.D7@114.4,144.45 v1(114.8,144.05) ; GG.D5@114.4,146.05 v1(114.8,146.45) ; FPGA.D13@115,183.1 v1(115.4,182.7) ; FPGA.D7@115,187.9 v1(115.4,188.3) ; FPGA.B17@116.6,179.9 v1(117,179.5) ; FPGA.B15@116.6,181.5 v1(117,181.1) ; FPGA.B10@116.6,185.5 v1(117,185.1) ; FPGA.B5@116.6,189.5 v1(117,189.9) ; FPGA.B1@116.6,192.7 v1(117,193.1) ; v1(117.397,210.585) R36.2@117.397,211.635 ; SRAM.23@120.7,106.3 v1(120.7,107.325) ; v1(123.1,116.575) SRAM.29@123.1,117.6 ; v1(129.4,168.22) CG1.4@130.7,168.22 ; OA2.4@132.9,208.65 v1(133.75,208.65) ; v1(153.85,166.45) R46.2@153.85,167.4 ; v1(154.35,187.25) R45.1@155.4,187.25 ; FPGA_FLASH.20@154.875,199.45 v1(154.875,200.6) ; v1(155.525,198.3) FPGA_FLASH.19@155.525,199.45 ; FPGA_FLASH.18@156.175,199.45 v1(156.175,200.6) ; v1(158.95,187.05) R44.1@160,187.05 ; v1(160.95,166.25) R47.2@160.95,167.2
  Bottom Layer w0.1: v1(59.7,195.65) R10.2@59.7,196.6 ; v1(61,183.65) R9.2@61,184.6 ; v1(68.587,144.171) R15.2@68.587,145.121 ; v1(68.587,149.759) R16.2@68.587,150.709 ; v1(68.587,155.347) R17.2@68.587,156.297 ; v1(68.587,160.935) R18.2@68.587,161.885 ; v1(68.587,166.523) R19.2@68.587,167.473 ; v1(74.45,103.75) R7.2@74.45,104.7 ; v1(87.5,184.775) C3.2@87.5,185.8 ; v1(88.38,178.064) C15.2@88.38,179.089 ; v1(91.402,192.364) C24.2@91.402,193.389 ; v1(93.968,178.064) C14.2@93.968,179.089 ; C33.2@94.7,142 v1(95.725,142) ; v1(95.671,184.864) C5.2@95.671,185.889 ; v1(95.8,182.675) C4.2@95.8,183.7 ; v1(97,188.875) C2.2@97,189.9 ; v1(97.244,192.364) C23.2@97.244,193.389 ; v1(98,172.275) C22.2@98,173.3 ; v1(99.4,154.425) C34.2@99.4,155.5 ; v1(99.556,178.064) C13.2@99.556,179.089 ; C32.2@103.8,139.4 v1(104.825,139.4) ; v1(104.425,172.7) C12.2@104.425,174.4 ; v1(105,151.775) C31.2@105,152.8 ; C38.2@105.1,144.7 v1(106.175,144.7) ; v1(105.85,95.95) R4.2@105.85,96.9 ; R1.2@107,138.75 v1(107.95,138.75) ; v1(110.6,172.975) C11.2@110.6,174 ; C30.2@112.6,152.2 112.6,151.086 112.644,151.042 v1(113.326,151.042) ; v1(115.8,194.575) C20.2@115.8,195.6 ; C40.2@118.4,136.1 v1(119.475,136.1) ; v1(118.625,172) C21.2@118.625,173.7 ; v1(119.625,141.103) 119.625,141.021 119.746,140.9 C39.2@120.7,140.9 ; v1(121.501,192.364) C19.2@121.501,193.389 ; v1(121.833,184.864) C27.2@121.833,185.889 ; v1(122.035,178.064) C9.2@122.035,179.089 ; v1(122.7,188.575) C28.2@122.7,189.6 ; C29.2@123.7,157 v1(124.725,157) ; v1(126.4,172.175) C10.2@126.4,173.2 ; C36.2@126.6,144.5 v1(127.675,144.5) ; C37.2@126.8,136.6 v1(127.875,136.6) ; C35.2@126.8,150.2 v1(127.875,150.2) ; v1(127.089,192.364) C18.2@127.089,193.389 ; v1(127.302,176.5) C8.2@127.302,178.2 ; v1(127.802,184.864) C26.2@127.802,185.889 ; v1(132.677,192.364) C17.2@132.677,193.389 ; v1(133.069,183.3) C25.2@133.069,185 ; v1(133.846,178.064) C7.2@133.846,179.089 ; v1(137.944,190.8) C16.2@137.944,192.5 ; v1(138.672,178.064) C6.2@138.672,179.089
VCC33V: P11.2
VCC_USB_SUPPLY: C51.2 FB3.2 P7.1 U3.20 | length 45.4
  Top Layer w0.1: v1(63.979,110.875) U3.20@66.25,110.875 67.97,110.875 69.774,109.072 69.774,80.569 P7.1@68.326,79.121
  Bottom Layer w0.1: FB3.2@56.65,109.9 C51.2@59.2,109.9 59.2,110.744 59.403,110.947 63.906,110.947 v1(63.979,110.875)
pads on no net: B1.2 B1.4 B2.2 B2.4 B3.2 B3.4 B4.2 B4.4 B5.2 B5.4 B6.2 B6.4 B7.2 B7.4 B8.2 B8.4 B9.2 B9.4 FB2.0 FPGA.A4 FPGA.A11 FPGA.A12 FPGA.B3 FPGA.B4 FPGA.B6 FPGA.B11 FPGA.B12 FPGA.B14 FPGA.B16 FPGA.C1 FPGA.C2 FPGA.C4 FPGA.C5 FPGA.C6 FPGA.C8 FPGA.C9 FPGA.C10 FPGA.C11 FPGA.C12 FPGA.C13 FPGA.C14 FPGA.C15 FPGA.D1 FPGA.D2 FPGA.D3 FPGA.D4 FPGA.D6 FPGA.D8 FPGA.D9 FPGA.D11 FPGA.D12 FPGA.D14 FPGA.E1 FPGA.E3 FPGA.E4 FPGA.E6 FPGA.E7 FPGA.E8 FPGA.E12 FPGA.E13 FPGA.F1 FPGA.F2 FPGA.F3 FPGA.F4 FPGA.F5 FPGA.F6 FPGA.F7 FPGA.F8 FPGA.F9 FPGA.F11 FPGA.F12 FPGA.F13 FPGA.G1 FPGA.G3 FPGA.G6 FPGA.G8 FPGA.G9 FPGA.G11 FPGA.H1 FPGA.H2 FPGA.H3 FPGA.H4 FPGA.H5 FPGA.H6 FPGA.H7 FPGA.J1 FPGA.J3 FPGA.J6 FPGA.J7 FPGA.K1 FPGA.K2 FPGA.K3 FPGA.K4 FPGA.K5 FPGA.K6 FPGA.K15 FPGA.K16 FPGA.L1 FPGA.L2 FPGA.L3 FPGA.L4 FPGA.L5 FPGA.L6 FPGA.L7 FPGA.L13 FPGA.M1 FPGA.M3 FPGA.M5 FPGA.M8 FPGA.M10 FPGA.M11 FPGA.M13 FPGA.M14 FPGA.N1 FPGA.N2 FPGA.N3 FPGA.N4 FPGA.N5 FPGA.N6 FPGA.N7 FPGA.N8 FPGA.N9 FPGA.N10 FPGA.N11 FPGA.N15 FPGA.N16 FPGA.P1 FPGA.P2 FPGA.P3 FPGA.P4 FPGA.P6 FPGA.P7 FPGA.P8 FPGA.P11 FPGA.P12 FPGA.P15 FPGA.P16 FPGA.R3 FPGA.R5 FPGA.R7 FPGA.R8 FPGA.R10 FPGA.R11 FPGA.T1 FPGA.T2 FPGA.T3 FPGA.T4 FPGA.T5 FPGA.T6 FPGA.T7 FPGA.T8 FPGA.T9 FPGA.T10 FPGA.T11 FPGA.T12 FPGA.T13 FPGA.T14 FPGA.T17 FPGA.T18 FPGA.U1 FPGA.U2 FPGA.U5 FPGA.U7 FPGA.U8 FPGA.U10 FPGA.U11 FPGA.U13 FPGA.U15 FPGA.U16 FPGA.U17 FPGA.U18 FPGA.V3 FPGA.V4 FPGA.V5 FPGA.V6 FPGA.V7 FPGA.V8 FPGA.V9 FPGA.V10 FPGA.V11 FPGA.V12 FPGA.V13 FPGA.V14 FPGA.V15 FPGA.V16 FPGA_FLASH.2 FPGA_FLASH.7 FPGA_FLASH.9 FPGA_FLASH.12 FPGA_FLASH.13 FPGA_FLASH.14 FPGA_FLASH.15 FPGA_FLASH.16 GG.B8 GG.B10 GG.B11 GG.E5 GG.E6 GG.E7 GG.F5 GG.F6 GG.F7 GG.G5 GG.G6 GG.G7 LED1.0 LED2.0 LED3.0 LED4.0 LED5.0 LED6.0 LED7.0 LED8.0 LED9.0 LED10.0 P1.2 P1.3 P1.5 P1.11 P1.15 P1.17 P11.12 P11.14 S1.1 S2.1 SD. SD.1 SD.8 SRAM.40 SRAM.43 U3.2 U3.3 U3.8 U3.12 U3.13 U3.14 U3.24 U3.28 USB1. USB1.4 X1.3 X1.4

## Polygon pours and split planes (outlines as drawn)
GND on Internal Plane 1 (split plane): 170.29,76.71 51.31,76.71 51.31,225.69 170.29,225.69
VCC33 on Internal Plane 2 (split plane): 170.29,76.71 51.31,76.71 51.31,225.69 170.29,225.69

## Text inside footprints (layer, text, board x,y; h text height)
C48: Top Overlay "-" at 75.351,78.097 h1.52 r90; Top Overlay "+" at 75.351,88.487 h1.52 r90
C49: Top Overlay "-" at 84.749,78.097 h1.52 r90; Top Overlay "+" at 84.749,88.487 h1.52 r90
C50: Top Overlay "-" at 94.147,78.097 h1.52 r90; Top Overlay "+" at 94.147,88.487 h1.52 r90
P1: Top Overlay "2" at 167.332,160.49 h1.27 r270; Top Overlay "1" at 164.792,160.49 h1.27 r270; Top Overlay "19" at 164.792,133.566 h1.27 r270; Top Overlay "20" at 167.332,133.566 h1.27 r270
P10: Top Overlay "2" at 83.332,162.34 h1.27 r270; Top Overlay "1" at 80.792,161.832 h1.27 r270; Top Overlay "9" at 80.792,148.116 h1.27 r270; Top Overlay "10" at 83.332,148.116 h1.27 r270
P11: Top Overlay "13" at 164.492,190.9 h1 r270; Top Overlay "1" at 164.492,201.6 h1 r270